# Altium PCB Apollo_Main_Board_1 8.PcbDoc (part 2 of 4)
Units mil, origin at the board's own origin, x right, y up, seen from the top; angles counter-clockwise.
Board outline 984.25 x 629.92 mil, 6 copper layers (Top, Inner Layer 2, Inner Layer 3, Inner Layer 4, Inner Layer 5, Bottom), stack 5.16 mil thick; 125 components, 112 nets, 514 pads, 2007 vias.
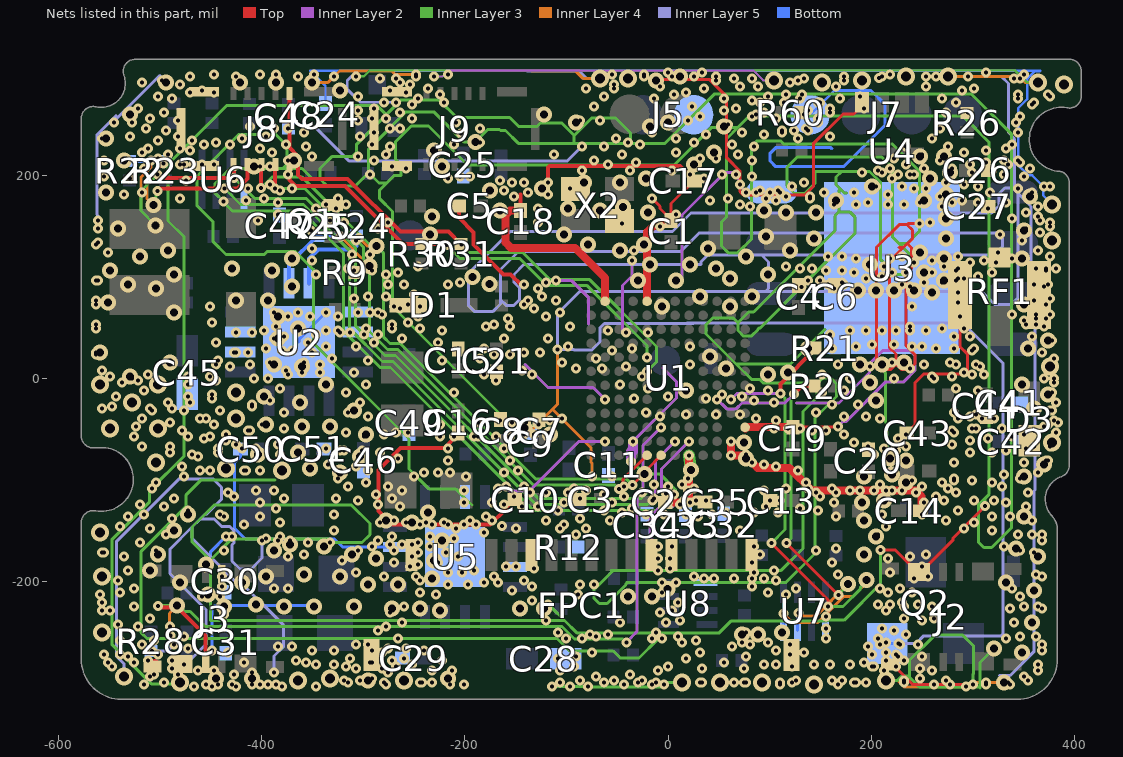
[diagram p6: the nets of this part, all layers, seen from the top]

## Via types
v1: diameter 9.84, hole 3.94, Inner Layer 4 to Bottom, 571 vias
v2: diameter 9.84, hole 3.94, Top to Inner Layer 2, 540 vias
v3: diameter 9.84, hole 3.94, Top to Inner Layer 3, 349 vias
v4: diameter 15.75, hole 7.87, Inner Layer 3 to Inner Layer 4, 268 vias
v5: diameter 9.84, hole 3.94, Inner Layer 5 to Bottom, 178 vias
v6: diameter 17.72, hole 9.84, Top to Bottom, 54 vias
v7: diameter 9.84, hole 3.94, Inner Layer 2 to Inner Layer 3, 25 vias
v8: diameter 9.84, hole 3.94, Inner Layer 4 to Inner Layer 5, 22 vias

## Nets (pads, with @x,y where several pads share a name; then routed paths per layer and width w, separated by ;. In a path a pad name is that pad's centre, name@x,y a point inside that pad or via, vN(x,y) a via of type N, cw(c..) or ccw(c..) an arc to the next point about the centre after c; other vN are vias at no path point) (continued)
GND: C1.1 C2.1 C3.1 C4.1 C5.1 C6.1 C7.1 C8.1 C9.1 C10.1 C11.1 C13.2 C14.2 C15.2 C16.2 C17.1 C18.2 C19.2 C20.2 C21.2 C24.2 C25.2 C26.2 C27.2 C28.2 C29.2 C30.1 C31.1 C32.2 C33.2 C34.2 C35.2 C41.2 C42.2 C43.2 C44.2 C45.2 C46.2 C47.1 C48.1 C49.2 C50.2 C51.2 D1.2 D3.1 FPC1.1 FPC1.5 FPC1.6 FPC1.12 FPC1.18 FPC1.19 FPC1.20 J2.0 J2.5 J3.0 J3.2 J3.7 J5.2 J7.1 J8.11 J8.12 J8.15 J9.11 J9.12 J9.15 Q1.2 Q2.2 R9.2 R12.2 R26.1 R60.2 RF1.2 RF1.3 RF1.4 U1.B2 U1.B5 U1.B12 U1.D2 U1.E12 U1.H1 U1.L1 U1.L2 U1.M1 U1.M3 U2.2 U2.3 U2.9 U2.10 U2.17 U3.4 U3.9 U4.4 U5.3 U5.11 U5.15 U5.17 U6.1 U7.1 U8.1 X2.2 X2.4 | length 22913.4
  Top w2.95: J3.7@-478.89,-281.12 -478.89,-299.9 v3(-478.06,-300.73) ; v2(-169.29,7.87) -169.44,6.41 C21.2@-168.93,6.41 ; v3(-127.57,-45.43) -127.57,-41.5 C7.1@-126.95,-40.88 ; v3(-96.77,186.8) -91.55,186.8 X2.4@-91.02,186.27 ; X2.2@-47.71,154.78 v3(-45.32,152.39) ; v3(-15.75,177.17) -7.89,169.31 -7.89,167.01 2.86,156.26 C1.1@2.86,155.38 2.86,172.02 25.17,194.32 C17.1@26.04,194.32 ; -12.38,294.24 40.57,294.24 57.68,277.13 57.68,217.01 70.83,203.86 70.83,183.73 73.98,180.58 134.86,180.58 142.98,188.7 142.98,230.88 172.33,260.23 182.93,260.23 190.98,268.28 U4.4@190.98,271.63 ; U1.M3@75.79,-48.23 76.26,-48.7 U1.M3@76.26,-49.66 ; C19.2@122.75,-48.1 166.35,-48.1 v3(167.21,-47.24) ; v3(131.18,90) 128.44,90 C4.1@128.44,91.22 ; v3(209.07,-169.13) 223.82,-169.13 245.14,-190.46 J2.5@247.11,-190.46 249.08,-190.46 280.59,-158.95 280.59,-157.25 v3(312.1,-125.74) ; J2.0@218.37,-281.88 221.33,-281.88 241.02,-301.57 v3(300.16,-301.57) ; 227.47,128.68 231.44,128.68 ; C43.2@234.77,-53.87 243.13,-45.51 243.13,-4.03 251.5,4.34 294.82,4.34 294.82,23.55 287.38,30.99 RF1.4@287.38,82.19 ; 235.44,132.68 239.44,128.68 239.44,108.22 234.02,102.8 234.02,32.19 243.03,23.18 243.03,14.09 237.54,8.6 229.52,8.6 224.21,13.91 ; v3(247.63,152.17) 236.21,152.17 235.22,151.18 ; C4.1@128.44,91.22 128.57,91.1 C4.1@128.44,91.22 ; 224.21,13.91 224.21,23.9 218,30.11 218,115.23 231.44,128.68 ; 224.21,13.91 218.72,8.42 206.36,8.42 205.17,9.61 205.17,128.85 227.5,151.18 235.22,151.18 ; 231.44,128.68 240.71,137.95 240.71,145.69 235.22,151.18
  Top w3.94: C16.2@-206.55,-53.87 -206.55,-54.74 -220.27,-68.46 -263.4,-68.46 -285.12,-90.18 -285.12,-130.51 -271.49,-144.14 -175.24,-144.14 -159.54,-128.44 -159.54,-127.21 -151.77,-119.44 C10.1@-150.9,-119.44 ; C5.1@-205.96,169.73 -205.96,158.24 -191.39,143.67 -191.39,131.65 -162.13,102.39 -155.22,102.39 v2@-143.96,91.13 ; C18.2@-145.14,165.17 -145.14,180.67 ; v2(-118.11,192.91) -118.11,207.7 -116.62,209.19 11.57,209.19 25.8,194.96 26.04,194.96 C17.1@26.04,194.32
  Top w7.87: C18.2@-145.14,165.17 -155.46,165.17 -160.16,160.46 -160.16,133.83 -154.63,128.3 -91.4,128.3 -62.01,98.91 U1.B12@-62.01,75.79 ; U1.E12@-20.67,75.79 -20.67,143.75 -12.06,152.36 2.86,152.36 C1.1@2.86,155.38 ; C2.1@-2.84,-122.16 20.67,-122.16 v3(20.67,-75.79) ; v3(62.01,-62.01) v3(62.01,-75.79) U1.M1@75.79,-75.79 88.2,-88.2 119.4,-88.2 141.8,-110.6 243.76,-110.6 249.33,-116.17 249.33,-130.36 C14.2@248.36,-130.36 ; U1.M3@76.26,-49.66 77.82,-48.1 C19.2@122.75,-48.1
  Top w10: J3.0@-507.63,-283.88 J3.0@-504.87,-281.12
  Inner Layer 2 w1.97: v2(-230.32,297.24) -221.82,297.24 -215.94,303.12 83.67,303.12 93.49,293.31 v6(104.33,293.31)
  Inner Layer 2 w2.95: -156.13,-110.91 -136.7,-110.91 -87.8,-62.01 v2(-62.01,-62.01) ; -140.63,13.52 -118.15,-8.97 -73.71,-8.97 v2(-62.01,-20.67) ; v2(-110.24,96.46) -95.4,96.46 -78.11,79.16 -78.11,53.39 ; -40.85,42.66 -44.81,46.63 -44.81,91.22 -35.43,100.6 v2(-35.43,116.14) ; v2(-34.45,-62.01) 8.25,-19.31 8.25,-3.37 -5.35,10.23 ; v2(-9.84,-165.35) -17.87,-157.32 -17.87,-136.46 -7.46,-126.05 4.92,-126.05 8.93,-122.05 v2(21.65,-122.05) ; 13.73,99.67 13.73,160.64 55.72,202.64 63.46,202.64 70.59,195.5 70.59,189.25 v2(76.77,183.07) ; 126.49,-24.34 168.2,-24.34 198.27,5.73 198.27,14.42 211.18,27.32 237.54,27.32 243.03,21.83 243.03,7.66 231.94,-3.43 214.2,-3.43 175.21,-42.42 172.03,-42.42 v3(167.21,-47.24)
  Inner Layer 2 w9.84: v7(-36.34,-81.8) -36.34,-71.95 -36.29,-71.9 -34.49,-71.9 -34.45,-71.86 v2(-34.45,-62.01)
  Inner Layer 3 w2.36: v3(-307.09,297.24) -299.37,297.24 -293.69,302.93 341.55,302.93 353.13,291.34 v6(364.17,291.34)
  Inner Layer 3 w2.95: v3(-478.06,-300.73) -508.63,-300.73 -547.54,-261.82 -547.54,-158.81 -510.64,-121.91 -510.64,-110.77 -476.26,-76.4 -476.26,138.98 -492.12,154.84 -492.12,210.78 -434.16,268.74 -286.73,268.74 -277.49,259.5 ; v4(-454.72,-183.07) v4@-450.35,-179.1 ; -386.71,-99.96 -459.46,-99.96 -474.67,-115.17 -474.67,-126.3 -518.65,-170.28 -518.65,-250.35 -512.82,-256.18 -109.27,-256.18 -97.01,-268.43 -54.01,-268.43 ; -193.1,-124.79 -209.12,-108.77 -235.58,-108.77 -254.98,-89.36 -254.98,-59.64 -348.8,34.17 -348.8,106.68 -366.86,124.74 -394.58,124.74 -397.45,121.87 -435.13,121.87 -447.72,134.46 -447.72,153.74 -463.49,169.51 -463.49,199.05 -422.36,240.18 -386.48,240.18 -375.18,228.88 -375.18,210.84 -379.44,206.58 ; v3(-127.57,-45.43) v4(-141.59,-49.13) -150.1,-40.62 -160.15,-40.62 -271.34,70.58 -271.34,164.22 -283.93,176.81 -283.93,185.41 -277.05,192.29 ; v4@-115.1,-223 -115.1,-225.28 -101.93,-238.45 ; v3(-114.17,-303.15) -83.71,-303.15 -83.07,-303.79 -7.1,-303.79 -2.52,-299.21 v6(13.78,-299.21) ; -56.11,-189.05 -53.75,-189.05 ; -54,-268.42 -47.19,-275.24 -28.57,-275.24 -10.14,-256.81 -10.14,-250.55 ; v7(-36.34,-81.8) v4(-23.25,-94.05) -8.29,-94.05 7.28,-109.62 7.28,-117.36 -5.31,-129.95 -132.77,-129.95 -273.3,10.58 -278.38,10.58 -283.45,10.58 -319.27,46.4 -319.27,122.92 -361.05,164.7 -429.06,164.7 -437.64,173.28 v7(-437.64,173.92) -445.77,182.05 -445.77,191.71 -430.9,206.58 -379.44,206.58 ; 82.76,141.83 82.21,142.38 ; 154.52,48.18 120.47,14.13 66.88,14.13 ; 168.03,185.28 168.03,163.75 ; 175.81,182.17 173.56,182.17 165.31,190.42 165.31,198.16 170.8,203.65 ; v3(209.07,-169.13) 209.07,-202.26 173.26,-238.07 157.25,-238.07 156.62,-238.7 62.25,-238.7 50.4,-250.55 -10.14,-250.55 ; v4(210.63,13.78) 214.08,4.42 214.08,-43.24 215.81,-44.97 215.81,-69.38 v4(218.5,-78.74) ; v6(214.57,-297.24) 225.9,-297.24 230.34,-292.81 236.17,-292.81 247.22,-303.86 306.15,-303.86 306.94,-304.65 306.94,-279.67 v4(320.87,-265.75) ; 237.65,-297.25 237.65,-277.61 262.39,-252.87 290.08,-252.87 300.74,-263.54 300.74,-290.57 300.16,-291.15 v3(300.16,-301.57) ; v3(312.1,-125.74) 312.1,-118.01 ; v4@-450.35,-179.1 -468.55,-160.91 -468.55,-146.42 -446.77,-124.64 -311.74,-124.64 -293.46,-142.92 -293.46,-146.61 -293.46,-153.92 -301.25,-161.71 -329.41,-161.71 -333.19,-157.93 -429.44,-157.93 -450.35,-178.84 v4@-450.35,-179.1 ; v4@-450.35,-179.1 -450.35,-238.45 -101.93,-238.45 ; -379.44,206.58 -360.14,206.58 -349.79,196.23 -342.61,196.23 ; -342.61,196.23 -335.4,189.02 -308.28,189.02 -294.76,202.53 ; -342.61,196.23 -342.61,206.43 -330.95,218.09 -311.03,218.09 -306.57,222.55 -306.57,230.41 -277.49,259.5 ; -294.76,202.53 -294.76,225.52 -258.39,261.89 -230.13,261.89 -201.04,232.8 v4(-189.74,232.8) -177.8,244.74 -165.84,244.74 -164.93,243.83 -159.96,243.83 -147.46,231.33 -92.41,231.33 ; -294.76,202.53 -284.52,192.29 -277.05,192.29 ; -277.49,259.5 -263.28,273.71 -225.24,273.71 -208.12,256.59 -155.87,256.59 -147.34,248.06 -129.03,248.06 -125.58,251.51 -104.91,251.51 -92.41,239.01 ; -277.05,192.29 -269.65,199.69 -263,199.69 -263,210.41 -268.5,215.91 -268.5,232.57 -252.78,248.29 -235.73,248.29 -197.48,210.04 5.96,210.04 42.89,246.97 68.85,246.97 ; -101.93,-238.45 -89.83,-250.55 -10.14,-250.55 ; -92.41,231.33 -36.97,231.33 ; -92.41,231.33 -92.41,239.01 ; -92.41,239.01 -75.23,256.19 -51.59,256.19 -36.97,241.57 -36.97,231.33 ; -53.75,-189.05 -73.16,-208.46 -73.16,-216.2 -67.67,-221.69 -59.95,-221.69 -41.42,-203.16 -41.42,-202.06 -40.23,-200.87 116.12,-200.87 144.56,-172.43 144.56,-39.12 165.7,-17.97 165.7,-5.25 160.21,0.24 152.49,0.24 146.56,-5.69 146.56,-9.95 ; -53.75,-189.05 111.24,-189.05 132.75,-167.54 132.75,-32.74 146.56,-18.93 146.56,-9.95 ; -36.97,231.33 -2.99,231.33 45.3,279.6 298.7,279.6 338.2,240.1 338.2,-146.89 318.49,-166.6 310.77,-166.6 305.28,-161.11 305.28,-124.83 312.1,-118.01 ; 66.88,14.13 81.99,-0.98 89.87,-0.98 93.35,-4.46 141.07,-4.46 146.56,-9.95 ; 66.88,14.13 37.3,43.7 37.3,52.75 43.71,59.16 64.25,59.16 68.74,54.67 ; 68.74,54.67 79.3,65.23 84.17,65.23 164.19,145.25 164.19,159.91 168.03,163.75 ; 68.74,54.67 68.74,46.93 74.23,41.44 81.95,41.44 88.37,47.86 88.37,48.43 89.3,49.36 90.54,49.36 v3(131.18,90) 184.17,142.99 184.17,158.41 178.68,163.9 168.18,163.9 168.03,163.75 ; 68.85,246.97 57.44,235.56 57.44,158.64 52.65,153.85 52.65,130.17 59.28,123.54 68.66,123.54 82.21,137.09 82.21,142.38 ; 68.85,246.97 80.2,258.32 289.92,258.32 316.07,232.17 316.07,-114.04 312.1,-118.01 ; 82.21,142.38 82.21,228.31 87.7,233.8 110.7,233.8 113.66,230.84 220.36,230.84 247.63,203.57 v3(247.63,152.17) 247.63,144.87 235.22,132.46 227.5,132.46 ; 170.8,203.65 145.25,203.65 144.81,203.21 144.81,192.15 134.53,181.87 124.35,181.87 117.14,189.08 117.14,207.91 127.07,217.84 210.15,217.84 221.04,206.95 221.04,138.92 227.5,132.46 ; 170.8,203.65 198.27,203.65 209.23,192.69 209.23,116.77 223.76,102.24 231.48,102.24 236.97,107.73 236.97,122.99 227.5,132.46
  Inner Layer 3 w11.81: v3(-96.77,186.8) v4(-82.68,192.91) ; v3(-45.32,152.39) v4(-44.59,168.62) ; v3(20.67,-75.79) v4(22.59,-90.02)
  Inner Layer 4 w2.95: v4(-350.39,291.34) -334.61,291.34 -323.49,302.47 -272.13,302.47 -268.88,299.21 v1(-248.03,299.21) ; v4(-141.59,-49.13) -132.51,-49.13 -113.85,-30.47 ; -134.34,302.63 -91.29,302.63 -83.94,295.28 v6(-66.93,295.28) ; v8(-109.09,28.49) -109.09,-25.71 -113.85,-30.47 ; v1(-74.8,-96.46) -74.8,-83.59 -75.66,-82.74 -75.66,-68.65 -113.85,-30.47 ; v6(214.57,-297.24) 225.9,-297.24 232.31,-303.65 295.77,-303.65 300.21,-299.21 v4(330.71,-299.21) ; v6(275.59,297.24) 345.42,297.24 351.32,291.34 v6(364.17,291.34)
  Inner Layer 5 w2.76: v1(-267.72,271.65) -302.91,271.65 -315.8,284.54 -315.8,292.95 -306.12,302.63 -139.07,302.63
  Inner Layer 5 w2.95: v1(-561.02,147.64) -561.02,160.11 -561.94,161.03 -561.94,239.94 -549.38,252.51 ; -543.33,258.55 -549.38,252.51 ; v6(-535.43,-293.31) -535.43,-280.85 -543.09,-273.19 -543.09,-160.86 -481.21,-98.98 -448.05,-98.98 -439.69,-107.34 -439.69,-119.16 -454.65,-134.12 -456.25,-134.12 -460.75,-138.62 ; -500.26,298.06 -545.82,252.51 -549.38,252.51 ; v1(-488.19,-285.43) -478.35,-285.43 -454.81,-261.89 -454.81,-227.79 -490.35,-192.25 -490.35,-168.22 -468.55,-146.42 ; v1(-399.61,-159.45) -399.61,-176.99 -410.4,-187.78 -421.4,-187.78 -429.19,-179.99 -429.19,-163.85 -427.48,-162.14 -427.48,-149.9 -431.71,-145.67 -439.47,-145.67 -446.51,-138.62 -460.75,-138.62 ; v1(-387.8,-289.37) -387.8,-273.26 -378.4,-263.87 -378.4,-243.16 -421.27,-200.29 -425.68,-200.29 -468.55,-157.42 -468.55,-146.42 ; -347.84,247.68 -314.23,214.07 -98.92,214.07 v1(-84.65,228.35) ; -139.07,302.63 -87.72,302.63 -80.37,295.28 v6(-66.93,295.28) ; 18.63,54.47 25.46,54.47 ; v5(226.85,-261.08) 243.9,-261.08 251.49,-253.49 327.97,-253.49 329.45,-252.01 329.45,15.03 290,54.48 ; v6(275.59,297.24) 327.95,297.24 334.95,290.25 334.95,241.82 341.05,235.72 341.05,185.36 ; 289.99,54.47 25.46,54.47 ; 325.97,-292.53 327.97,-292.53 ; v5(334.65,-299.21) 327.97,-292.53 ; -468.55,-146.42 -460.75,-138.62 ; -164.88,77.3 -164.88,73.16 -172.17,65.87 -190.86,65.87 -196.35,71.36 -196.35,103.53 -155.43,144.45 4.22,144.45 22.42,162.65 318.44,162.65 325.82,170.03 325.82,181.79 331.36,187.33 339.08,187.33 341.05,185.36 ; -164.88,77.3 -159.39,71.81 -151.67,71.81 -146.18,77.3 -146.18,88.9 -151.74,94.46 -151.74,102.2 -141.98,111.96 32.45,111.96 32.45,114.75 39.15,121.45 91.94,121.45 ; -164.88,77.3 -164.88,107.16 -147.28,124.76 12.38,124.76 30.58,142.96 323.67,142.96 329.16,137.47 329.16,129.73 320.88,121.45 91.94,121.45 ; 25.46,54.47 24.85,53.86 -62.77,53.86 -67.22,49.41 -67.22,35.69 -75.08,27.83 -92.42,27.83 -93.08,28.49 v8(-109.09,28.49) -109.09,63.23 -86.94,85.38 95.85,85.38 ; 91.94,121.45 98.91,114.48 98.91,88.44 95.85,85.38 ; 95.85,85.38 308.69,85.38 321.67,72.4 337.67,72.4 344.57,79.3 344.57,181.84 ; 327.97,-292.53 336.64,-292.53 359.95,-269.23 359.95,-111.22 361.16,-110.01 361.16,89.02 357.28,92.9 357.28,169.13 344.57,181.84 ; 341.05,185.36 344.57,181.84
  Bottom w2.36: C24.2@-337.17,270.52 -337.17,287.83 -352.2,302.86 -91.59,302.86 ; v6(-66.93,295.28) -84,295.28 -91.59,302.86 ; v6(377.95,171.26) 369.07,180.14 369.07,189.02 358.28,199.8 354.56,199.8 344.5,209.86 344.5,265.76 353.35,274.61 353.35,294.71 360.75,302.11 365.64,302.11 366.39,302.86 -91.59,302.86
  Bottom w2.95: v1(-448.82,-267.72) -448.82,-228.79 -450.19,-227.42 ; v1(-435.04,-155.51) -450.19,-170.66 -450.19,-227.42 ; C50.2@-420.85,-69.61 -420.85,-77.46 -426.69,-83.3 -426.69,-147.55 -416.17,-158.07 -328.34,-158.07 -320.31,-166.1 U5.11@-268.68,-166.1 ; U2.17@-363.17,35.65 -363.17,38.41 v1(-336.61,64.96) ; -350.54,-223.65 -446.42,-223.65 -450.19,-227.42 ; U2.9@-305.29,65.18 v5(-305.12,64.96) ; J7.1@139.75,259.26 163.69,283.19 199.66,283.19 213.68,269.17 213.68,249.35 172.66,208.32 105.9,208.32 100.41,213.81 100.41,221.55 105.9,227.04 160.14,227.04 161.13,226.05 ; Q2.2@215.73,-261.08 v5(226.85,-261.08) Q2.2@215.73,-261.08
  other v1: 293.31,-303.15 -277.56,-301.18 167.32,-301.18 312.99,-301.18 -244.09,-299.21 -106.3,-299.21 74.8,-299.21 122.05,-299.21 183.07,-299.21 194.88,-299.21 -318.9,-297.24 -86.61,-297.24 -53.15,-297.24 -25.59,-297.24 232.28,-297.24 -509.84,-293.31 -70.87,-293.31 350.39,-293.31 -427.17,-291.34 -275.59,-289.37 -462.6,-287.4 -106.3,-287.4 -9.84,-287.4 33.46,-285.43 -316.93,-283.46 -92.52,-283.46 0,-283.46 200.79,-283.46 364.17,-281.5 -551.18,-279.53 -417.32,-279.53 -356.3,-279.53 -293.31,-279.53 -271.65,-277.56 232.28,-277.56 -259.84,-275.59 -108.27,-275.59 17.72,-275.59 -531.5,-273.62 -90.55,-273.62 200.79,-271.65 -433.07,-269.69 -281.5,-269.69 -74.8,-269.69 214.57,-269.69 246.06,-261.81 368.11,-261.81 13.78,-259.84 27.56,-257.87 -265.75,-255.91 -15.75,-255.91 155.51,-255.91 206.69,-255.91 -76.77,-251.97 -285.43,-248.03 155.51,-246.06 210.63,-246.06 -261.81,-240.16 232.28,-236.22 214.57,-228.35 368.11,-226.38 -557.09,-220.47 230.31,-220.47 -228.35,-212.6 -244.09,-210.63 216.54,-210.63 -216.54,-202.76 -86.61,-202.76 -72.83,-202.76 -244.09,-198.82 35.43,-196.85 45.28,-196.85 64.96,-196.85 82.68,-196.85 94.49,-196.85 25.59,-194.88 368.11,-194.88 -216.54,-190.94 -202.76,-190.94 218.5,-190.94 -190.94,-188.98 -159.45,-185.04 -149.61,-185.04 -246.06,-183.07 216.54,-177.17 -358.27,-173.23 -555.12,-171.26 -246.06,-171.26 -234.25,-165.35 -273.62,-163.39 -261.81,-163.39 -354.33,-161.42 -246.06,-161.42 -234.25,-155.51 -90.55,-153.54 368.11,-153.54 -181.1,-151.57 318.9,-149.61 -106.3,-147.64 291.34,-147.64 214.57,-145.67 301.18,-141.73 -57.09,-139.76 -531.5,-135.83 -437.01,-135.83 29.53,-135.83 165.35,-135.83 318.9,-135.83 -21.65,-133.86 -3.94,-133.86 17.72,-133.86 210.63,-133.86 -45.28,-131.89 84.65,-131.89 108.27,-131.89 -62.99,-129.92 147.64,-129.92 285.43,-129.92 -35.43,-127.95 129.92,-127.95 -143.7,-125.98 -127.95,-125.98 -519.69,-124.02 -285.43,-124.02 -161.42,-124.02 -200.79,-122.05 -55.12,-122.05 0,-122.05 163.39,-122.05 15.75,-120.08 27.56,-120.08 110.24,-120.08 301.18,-120.08 320.87,-120.08 -13.78,-118.11 -43.31,-116.14 -287.4,-114.17 -62.99,-114.17 5.91,-114.17 -433.07,-112.2 -135.83,-112.2 -120.08,-112.2 -98.43,-112.2 -25.59,-112.2 283.46,-112.2 -200.79,-110.24 -80.71,-110.24 94.49,-110.24 220.47,-110.24 -507.87,-108.27 25.59,-108.27 116.14,-108.27 137.8,-108.27 161.42,-108.27 -159.45,-106.3 -141.73,-106.3 -43.31,-106.3 0,-106.3 13.78,-104.33 208.66,-104.33 318.9,-102.36 299.21,-100.39 -198.82,-96.46 -55.12,-96.46 -240.16,-92.52 -226.38,-92.52 -214.57,-92.52 -161.42,-92.52 -460.63,-90.55 -417.32,-90.55 -147.64,-90.55 -478.35,-86.61 -334.65,-84.65 -155.51,-80.71 -468.5,-74.8 -381.89,-74.8 -490.16,-72.83 -442.91,-72.83 -322.83,-70.87 -419.29,-68.9 -336.61,-68.9 -517.72,-66.93 -435.04,-61.02 -456.69,-59.06 -190.94,-57.09 -169.29,-57.09 -155.51,-57.09 -279.53,-55.12 -267.72,-53.15 -255.91,-53.15 281.5,-53.15 -478.35,-51.18 299.21,-49.21 -523.62,-47.24 370.08,-47.24 -446.85,-45.28 383.86,-43.31 106.3,-41.34 86.61,-39.37 208.66,-39.37 -7.87,-37.4 173.23,-37.4 194.88,-37.4 17.72,-35.43 47.24,-35.43 70.87,-35.43 303.15,-35.43 -21.65,-33.46 145.67,-33.46 281.5,-33.46 377.95,-31.5 -509.84,-29.53 -488.19,-29.53 -547.24,-27.56 161.42,-25.59 187.01,-25.59 -470.47,-23.62 104.33,-23.62 84.65,-21.65 -448.82,-19.69 -33.46,-19.69 37.4,-19.69 0,-17.72 72.83,-17.72 53.15,-15.75 151.57,-13.78 98.43,-11.81 173.23,-11.81 305.12,-11.81 -19.69,-9.84 80.71,-9.84 283.46,-9.84 -472.44,-5.91 -47.24,-5.91 379.92,-3.94 -444.88,-1.97 179.13,0 222.44,0 261.81,0 370.08,0 -25.59,1.97 151.57,3.94 291.34,5.91 -557.09,7.87 -375.98,7.87 -90.55,9.84 -64.96,9.84 -41.34,11.81 307.09,11.81 -444.88,13.78 -342.52,13.78 21.65,13.78 167.32,13.78 251.97,13.78 -104.33,15.75 277.56,15.75 -70.87,19.69 -171.26,23.62 -155.51,23.62 -425.2,25.59 -413.39,25.59 -350.39,25.59 -125.98,25.59 -379.92,27.56 -370.08,27.56 -55.12,27.56 -395.67,29.53 -181.1,29.53 -35.43,29.53 161.42,29.53 263.78,29.53 281.5,29.53 301.18,29.53 -336.61,31.5 21.65,31.5 185.04,31.5 240.16,31.5 250,31.5 200.79,33.46 222.44,33.46 -444.88,35.43 -354.33,35.43 -118.11,39.37 281.5,41.34 -346.46,43.31 -299.21,43.31 159.45,43.31 -425.2,45.28 -409.45,45.28 -312.99,45.28 -41.34,45.28 -19.69,45.28 -397.64,47.24 -336.61,47.24 -324.8,47.24 -59.06,47.24 179.13,47.24 194.88,47.24 210.63,47.24 224.41,47.24 238.19,47.24 253.94,47.24 -562.99,49.21 269.68,49.21 370.08,51.18 -448.82,55.12 350.39,57.09 362.2,59.06 -352.36,61.02 -324.8,61.02 -246.06,61.02 338.58,62.99 375.98,62.99 -364.17,64.96 -263.78,68.9 -450.79,70.87 -309.06,78.74 375.98,78.74 -295.28,80.71 -277.56,80.71 -250,82.68 -127.95,88.58 -275.59,92.52 -259.84,92.52 157.48,92.52 173.23,92.52 374.02,92.52 -120.08,94.49 -561.02,96.46 137.8,96.46 149.61,96.46 194.88,98.43 291.34,98.43 210.63,100.39 305.12,100.39 -265.75,104.33 183.07,104.33 220.47,104.33 234.25,104.33 318.9,104.33 155.51,106.3 171.26,106.3 283.46,106.3 -314.96,108.27 129.92,108.27 141.73,108.27 372.05,108.27 381.89,108.27 -246.06,110.24 116.14,110.24 212.6,110.24 242.13,114.17 297.24,114.17 259.84,116.14 311.02,116.14 185.04,118.11 218.5,118.11 157.48,120.08 171.26,120.08 230.31,120.08 285.43,120.08 375.98,120.08 -551.18,124.02 -562.99,131.89 -285.43,147.64 -7.87,149.61 375.98,149.61 -275.59,153.54 -403.54,155.51 364.17,159.45 -383.86,161.42 7.87,161.42 70.87,171.26 185.04,171.26 216.54,171.26 232.28,171.26 -383.86,173.23 196.85,173.23 305.12,173.23 -415.35,175.2 289.37,175.2 -480.32,177.17 -397.64,177.17 59.06,177.17 139.76,177.17 216.54,181.1 86.61,183.07 100.39,183.07 110.24,183.07 153.54,183.07 183.07,183.07 -381.89,185.04 -413.39,187.01 -370.08,187.01 242.13,187.01 230.31,188.98 305.12,188.98 375.98,188.98 -391.73,190.94 70.87,190.94 291.34,190.94 -474.41,194.88 -216.54,196.85 35.43,196.85 220.47,196.85 -204.72,198.82 -194.88,198.82 82.68,198.82 -374.02,200.79 53.15,200.79 66.93,200.79 238.19,200.79 299.21,202.76 3.94,204.72 206.69,204.72 218.5,206.69 251.97,206.69 356.3,206.69 -391.73,208.66 -476.38,210.63 -59.06,210.63 234.25,210.63 297.24,210.63 334.65,210.63 -31.5,212.6 312.99,212.6 346.46,212.6 82.68,214.57 222.44,216.54 -350.39,218.5 -45.28,220.47 68.9,220.47 -389.76,222.44 7.87,222.44 291.34,222.44 312.99,224.41 332.68,226.38 -356.3,228.35 84.65,228.35 234.25,228.35 275.59,228.35 -375.98,230.31 -27.56,230.31 62.99,230.31 -39.37,232.28 25.59,232.28 7.87,236.22 127.95,236.22 259.84,236.22 -395.67,238.19 159.45,238.19 37.4,240.16 94.49,240.16 -358.27,242.13 72.83,242.13 112.2,244.09 -387.8,246.06 -374.02,246.06 135.83,246.06 342.52,251.97 19.68,253.94 106.3,255.91 147.64,255.91 31.5,257.87 82.68,257.87 94.49,261.81 55.12,263.78 137.8,263.78 66.93,265.75 159.45,265.75 23.62,267.72 358.27,269.69 -220.47,271.65 114.17,271.65 147.64,271.65 82.68,273.62 -246.06,275.59 55.12,275.59 129.92,275.59 98.43,277.56 375.98,277.56 -224.41,279.53 5.91,279.53 17.72,281.5 -236.22,285.43 -53.15,285.43 35.43,285.43 70.87,287.4 253.94,287.4 -253.94,289.37 -263.78,291.34 47.24,293.31 127.95,293.31 173.23,293.31 82.68,295.28 -230.32,297.24 -23.62,297.24 25.59,297.24 210.63,297.24 263.78,297.24 -216.54,299.21 -55.12,299.21
  other v2: -515.75,-301.18 -454.72,-301.18 -442.91,-301.18 -409.45,-301.18 -393.7,-301.18 -214.57,-301.18 -43.31,-301.18 -15.75,-301.18 -3.94,-301.18 261.81,-301.18 277.56,-301.18 336.61,-301.18 -496.06,-299.21 -62.99,-299.21 -29.53,-299.21 -291.34,-295.28 -232.28,-287.4 -212.6,-287.4 -307.09,-285.43 -281.5,-285.43 74.8,-285.43 -267.72,-283.46 122.05,-283.46 202.76,-283.46 -476.38,-281.5 -346.46,-281.5 -328.74,-281.5 -251.97,-281.5 94.49,-281.5 106.3,-281.5 143.7,-281.5 159.45,-281.5 179.13,-281.5 -525.59,-279.53 -291.34,-279.53 55.12,-279.53 192.91,-279.53 -511.81,-277.56 -488.19,-277.56 -366.14,-277.56 -222.44,-277.56 214.57,-277.56 -312.99,-275.59 76.77,-273.62 -539.37,-271.65 -501.97,-271.65 120.08,-271.65 133.86,-269.69 -350.39,-267.72 -328.74,-267.72 -291.34,-267.72 -240.16,-267.72 106.3,-267.72 -472.44,-265.75 -275.59,-265.75 -257.87,-265.75 -383.86,-263.78 -370.08,-263.78 62.99,-263.78 196.85,-263.78 -517.72,-261.81 -486.22,-261.81 -307.09,-261.81 80.71,-261.81 120.08,-261.81 208.66,-261.81 228.35,-261.81 98.43,-259.84 -539.37,-257.87 -505.91,-257.87 -100.39,-255.91 -84.65,-255.91 -5.91,-255.91 -476.38,-253.94 -70.87,-253.94 9.84,-253.94 -59.06,-251.97 -108.27,-250 -11.81,-250 -521.65,-244.09 -490.16,-244.09 -541.34,-242.13 -47.24,-240.16 -1.97,-240.16 360.24,-240.16 -120.08,-238.19 11.81,-238.19 -509.84,-236.22 -437.01,-232.28 -7.87,-230.31 -549.21,-228.35 3.94,-228.35 -525.59,-224.41 232.28,-224.41 -118.11,-222.44 206.69,-222.44 218.5,-222.44 9.84,-220.47 -458.66,-214.57 -440.94,-214.57 -88.58,-212.6 116.14,-212.6 -539.37,-210.63 -5.91,-210.63 98.43,-210.63 240.16,-210.63 -525.59,-206.69 125.98,-206.69 208.66,-206.69 228.35,-206.69 338.58,-206.69 360.24,-206.69 -133.86,-204.72 82.68,-204.72 -5.91,-200.79 7.87,-200.79 -541.34,-198.82 -141.73,-198.82 106.3,-198.82 242.13,-196.85 255.91,-194.88 167.32,-192.91 84.65,-190.94 -531.5,-188.98 -9.84,-188.98 104.33,-188.98 1.97,-187.01 250,-185.04 82.68,-181.1 161.42,-181.1 -285.43,-177.17 -9.84,-177.17 1.97,-177.17 -535.43,-175.2 238.19,-175.2 253.94,-173.23 360.24,-171.26 -503.94,-169.29 -387.8,-169.29 -305.12,-169.29 145.67,-169.29 346.46,-169.29 165.35,-167.32 3.94,-165.35 330.71,-165.35 -519.69,-161.42 -381.89,-155.51 -494.09,-153.54 206.69,-153.54 70.87,-149.61 -509.84,-147.64 -149.61,-147.64 -80.71,-147.64 -539.37,-145.67 -163.69,-145.42 -417.32,-143.7 -244.09,-143.7 -232.28,-143.7 -216.54,-143.7 -200.79,-143.7 -188.98,-143.7 -102.36,-143.7 -381.89,-141.73 -283.46,-141.73 -257.87,-141.73 -269.69,-139.76 -120.08,-139.76 358.27,-139.76 -488.19,-137.8 -86.61,-137.8 -401.57,-135.83 -179.13,-135.83 336.61,-135.83 -515.75,-133.86 -440.94,-133.86 250,-133.86 -472.44,-129.92 -108.27,-129.92 -385.83,-127.95 -496.06,-125.98 352.36,-125.98 11.81,-124.02 -401.57,-122.05 -173.23,-122.05 -102.36,-122.05 251.97,-122.05 332.68,-122.05 -305.12,-120.08 37.4,-120.08 100.39,-120.08 -486.22,-118.11 -377.95,-118.11 -86.61,-118.11 -427.17,-116.14 -151.57,-116.14 263.78,-116.14 145.67,-112.2 165.35,-112.2 244.09,-112.2 -405.51,-110.24 -387.8,-110.24 19.68,-110.24 179.13,-110.24 188.98,-110.24 202.76,-110.24 214.57,-110.24 230.31,-110.24 -167.32,-108.27 -92.52,-108.27 275.59,-108.27 -314.96,-106.3 328.74,-106.3 -503.94,-102.36 -297.24,-102.36 135.83,-102.36 19.68,-98.43 281.5,-98.43 346.46,-98.43 -476.38,-96.46 330.71,-94.49 364.17,-92.52 -450.79,-90.55 127.95,-90.55 -307.09,-86.61 106.3,-86.61 94.49,-84.65 82.68,-82.68 281.5,-82.68 350.39,-82.68 374.02,-80.71 -462.6,-76.77 76.77,-74.8 297.24,-72.83 318.9,-72.83 -301.18,-70.87 224.41,-70.87 332.68,-70.87 -442.91,-68.9 -405.51,-68.9 196.85,-66.93 375.98,-66.93 279.53,-64.96 183.07,-62.99 297.24,-61.02 314.96,-59.06 -472.44,-57.09 -450.79,-57.09 -299.21,-57.09 -224.41,-57.09 -187.01,-57.09 338.58,-57.09 173.23,-55.12 -204.72,-53.15 381.89,-53.15 141.73,-51.18 155.51,-51.18 279.53,-51.18 104.33,-49.21 118.11,-49.21 129.92,-49.21 303.15,-49.21 328.74,-49.21 -399.61,-45.28 -224.41,-45.28 -187.01,-43.31 -139.76,-43.31 -165.35,-41.34 -116.14,-41.34 379.92,-41.34 -460.63,-39.37 -104.33,-39.37 285.43,-39.37 309.06,-39.37 320.87,-39.37 297.24,-37.4 -314.96,-33.46 -476.38,-31.5 -303.15,-23.62 381.89,-23.62 -391.73,-21.65 -472.44,-17.72 -448.82,-15.75 -210.63,-13.78 377.95,-13.78 -297.24,-5.91 -169.29,-1.97 -527.56,0 -393.7,0 379.92,0 -472.44,1.97 -450.79,1.97 259.84,1.97 279.53,1.97 -374.02,3.94 -181.1,3.94 -133.86,3.94 299.21,3.94 311.02,3.94 -309.06,5.91 -143.7,7.87 283.46,13.78 303.15,13.78 -391.73,15.75 -442.91,17.72 -295.28,17.72 -222.44,17.72 -185.04,19.69 379.92,19.69 -562.99,23.62 -427.17,25.59 299.21,27.56 -206.69,29.53 281.5,29.53 -307.09,31.5 -289.37,35.43 -226.38,35.43 377.95,37.4 -261.81,39.37 297.24,41.34 -322.83,45.28 -222.44,47.24 -297.24,49.21 -271.65,49.21 -244.09,49.21 291.34,49.21 -155.51,51.18 238.19,51.18 -171.26,53.15 -255.91,55.12 -120.08,61.02 287.4,61.02 -285.43,64.96 -106.3,64.96 -131.89,68.9 -269.69,70.87 -244.09,70.87 240.16,70.87 -562.99,72.83 -255.91,72.83 -141.73,72.83 285.43,74.8 -110.24,76.77 -124.02,80.71 238.19,90.55 -216.54,92.52 -141.73,92.52 -204.72,94.49 -120.08,94.49 -346.46,102.36 -277.56,102.36 -309.06,106.3 -291.34,106.3 322.83,114.17 -350.39,116.14 338.58,118.11 -311.02,122.05 -293.31,122.05 324.8,124.02 -45.28,125.98 -33.46,125.98 -350.39,127.95 -307.09,135.83 348.43,135.83 326.77,141.73 -351.51,145.53 352.36,147.64 -318.9,153.54 -332.68,155.51 338.58,157.48 -346.46,167.32 -326.77,167.32 314.96,167.32 80.71,169.29 364.17,169.29 -336.61,171.26 332.68,173.23 -118.11,181.1 -553.15,183.07 -517.72,183.07 316.93,183.07 358.27,183.07 122.05,188.98 133.86,192.91 -293.31,200.79 226.38,200.79 242.13,200.79 330.71,200.79 190.94,202.76 210.63,202.76 318.9,204.72 -515.75,206.69 -257.87,206.69 -271.65,208.66 -480.32,210.63 -458.66,210.63 -446.85,210.63 -289.37,214.57 330.71,214.57 -533.46,216.54 -501.97,216.54 -305.12,218.5 -492.13,220.47 -277.56,220.47 -112.2,220.47 -470.47,224.41 -511.81,226.38 -480.32,226.38 -273.62,228.35 -456.69,230.31 -431.1,230.31 -291.34,230.31 -210.63,230.31 338.58,230.31 -444.88,232.28 -185.04,232.28 -501.97,234.25 -468.5,234.25 -557.09,236.22 -419.29,236.22 -482.28,238.19 -303.15,238.19 -289.37,242.13 -15.75,242.13 112.2,242.13 -494.09,244.09 124.02,244.09 137.8,244.09 -513.78,246.06 -273.62,246.06 -263.78,246.06 -185.04,246.06 267.72,246.06 -411.42,248.03 -527.56,251.97 -208.66,251.97 147.64,251.97 -482.28,253.94 -86.61,253.94 -66.93,253.94 -509.84,255.91 -277.56,255.91 -251.97,255.91 86.61,259.84 133.86,259.84 -496.06,261.81 -263.78,261.81 159.45,261.81 273.62,261.81 295.28,261.81 -521.65,265.75 192.91,265.75 -72.83,267.72 -251.97,269.69 90.55,271.65 149.61,271.65 283.46,271.65 -488.19,275.59 -13.78,275.59 169.29,275.59 269.68,275.59 -62.99,277.56 188.98,277.56 116.14,279.53 131.89,279.53 344.49,279.53 374.02,279.53 -257.87,281.5 -273.62,283.46 289.37,283.46 -498.03,293.31 -283.46,295.28 -267.72,295.28 340.55,295.28 -425.2,297.24 -248.03,297.24 47.24,297.24 -385.83,299.21 -348.43,299.21 33.46,301.18
  other v3: -466.54,-303.15 -379.92,-303.15 -346.46,-303.15 -96.46,-303.15 -78.74,-303.15 -429.13,-301.18 -200.79,-301.18 -314.96,-299.21 -279.53,-299.21 -242.13,-299.21 -232.28,-299.21 33.46,-299.21 64.96,-299.21 76.77,-299.21 110.24,-299.21 185.04,-299.21 194.88,-299.21 232.28,-299.21 312.99,-299.21 125.98,-297.24 161.42,-297.24 171.26,-297.24 354.33,-297.24 -505.91,-291.34 -482.28,-291.34 212.6,-287.4 364.17,-287.4 -547.24,-283.46 224.41,-283.46 226.38,-273.62 -555.12,-271.65 368.11,-267.72 332.68,-255.91 346.46,-253.94 362.2,-253.94 340.55,-240.16 -557.09,-228.35 336.61,-226.38 350.39,-224.41 364.17,-224.41 -133.86,-218.5 346.46,-214.57 -559.06,-212.6 -153.54,-208.66 -387.8,-206.69 -374.02,-206.69 -438.98,-204.72 -167.32,-200.79 -438.98,-194.88 -279.53,-194.88 -248.03,-194.88 362.2,-192.91 -307.09,-190.94 -253.94,-185.04 -269.69,-181.1 -320.87,-179.13 -374.02,-175.2 -251.97,-175.2 90.55,-173.23 -557.09,-171.26 -437.01,-169.29 -269.69,-169.29 84.65,-165.35 -251.97,-163.39 -285.43,-159.45 368.11,-159.45 -395.67,-157.48 -429.13,-155.51 -271.65,-155.51 344.49,-153.54 358.27,-153.54 354.33,-112.2 -415.35,-90.55 -401.57,-90.55 -295.28,-90.55 -265.75,-78.74 202.76,-74.8 -283.46,-72.83 -318.9,-70.87 212.6,-68.9 352.36,-68.9 -490.16,-66.93 224.41,-66.93 234.25,-66.93 360.24,-66.93 -425.2,-64.96 -383.86,-64.96 226.38,-59.06 -525.59,-57.09 -435.04,-55.12 234.25,-55.12 350.39,-55.12 -316.93,-53.15 -413.39,-51.18 360.24,-51.18 -377.95,-49.21 374.02,-45.28 -490.16,-43.31 -153.54,-43.31 -517.72,-39.37 -295.28,-37.4 -377.95,-33.46 -507.87,-31.5 375.98,-31.5 -557.09,-29.53 -409.45,-27.56 -492.13,-23.62 -543.31,-17.72 -316.93,-13.78 -515.75,-11.81 -381.89,-9.84 -407.48,0 -549.21,1.97 -511.81,3.94 -431.1,11.81 -411.42,13.78 368.11,25.59 358.27,41.34 -562.99,53.15 352.36,53.15 362.2,53.15 372.05,59.06 362.2,62.99 372.05,72.83 360.24,76.77 285.43,84.65 163.39,88.58 370.08,90.55 360.24,92.52 171.26,94.49 -562.99,96.46 285.43,98.43 372.05,106.3 285.43,108.27 362.2,108.27 364.17,125.98 -561.02,133.86 366.14,143.7 -127.95,153.54 257.87,153.54 375.98,153.54 -561.02,155.51 366.14,155.51 352.36,163.39 -143.7,165.35 -127.95,167.32 269.68,169.29 -316.93,171.26 106.3,175.2 -324.8,177.17 96.46,177.17 -151.57,179.13 116.14,179.13 139.76,179.13 -535.43,181.1 -137.8,183.07 -161.42,185.04 90.55,185.04 108.27,185.04 344.49,187.01 370.08,188.98 -153.54,192.91 -141.73,192.91 -165.35,194.88 -529.53,196.85 -555.12,198.82 350.39,198.82 -555.12,214.57 344.49,214.57 -517.72,222.44 -529.53,238.19 -203.8,240.88 344.49,242.13 -545.28,251.97 -305.12,253.94 -291.34,255.91 346.46,257.87 -305.12,263.78 -289.37,265.75 -279.53,271.65 360.24,271.65 -501.97,277.56 -305.12,277.56 -470.47,281.5 -446.85,281.5 -458.66,283.46 -80.71,285.43 301.18,285.43 88.58,287.4 165.35,287.4 -480.32,289.37 -53.15,289.37 -517.72,291.34 120.08,291.34 133.86,295.28 207.67,295.62 -470.47,297.24 -364.17,297.24 -328.74,297.24 173.23,297.24 253.94,297.24 295.28,297.24 -446.85,299.21 -401.57,299.21 -23.62,299.21 218.5,299.21 350.39,299.21 0,301.18 312.99,301.18
  other v4: -295.28,-297.24 -444.88,-295.28 -409.45,-295.28 -216.54,-295.28 348.43,-269.69 72.83,-251.97 88.58,-251.97 112.2,-250 358.27,-240.16 -224.41,-228.35 -271.65,-226.38 -244.09,-226.38 -145.67,-226.38 -122.05,-226.38 -437.01,-224.41 -377.95,-224.41 -348.43,-224.41 -309.06,-224.41 -405.51,-222.44 -39.37,-214.57 -15.75,-214.57 -452.76,-212.6 360.24,-208.66 -0.61,-207.33 -295.28,-202.76 -265.75,-202.76 -480.32,-200.79 -419.29,-200.79 332.68,-200.79 -232.28,-196.85 -395.67,-194.88 -322.83,-194.88 -358.27,-192.91 -509.84,-188.98 -230.32,-179.13 -287.4,-177.17 364.17,-175.2 -501.97,-173.23 -311.02,-173.23 192.91,-173.23 -387.8,-169.29 342.52,-167.32 -338.58,-165.35 -372.05,-163.39 -222.44,-159.45 204.72,-155.51 -486.22,-149.61 -251.97,-141.73 -277.56,-139.76 192.91,-139.76 350.39,-135.83 -472.44,-133.86 -236.22,-131.89 190.94,-122.05 212.6,-120.08 234.25,-102.36 192.91,-96.46 350.39,-96.46 220.47,-94.49 -322.83,-92.52 -352.36,-88.58 370.08,-84.65 234.25,-80.71 76.77,-78.74 -303.15,-76.77 -403.54,-74.8 -364.17,-72.83 74.8,-62.99 -297.24,-55.12 -116.14,-55.12 -360.24,-47.24 -332.68,-47.24 -395.67,-45.28 -309.06,-31.5 360.24,-29.53 -362.2,-23.62 204.72,-21.65 -397.64,-17.72 374.02,-15.75 17.72,-11.81 -336.61,-5.91 348.43,-5.91 198.82,-3.94 -529.53,1.97 98.43,3.94 118.11,5.91 57.09,9.84 -360.24,11.81 -387.8,13.78 188.98,13.78 -490.16,15.75 232.28,15.75 41.34,21.65 -559.06,25.59 137.8,29.53 354.33,29.53 374.02,37.4 -383.86,39.37 -364.17,49.21 -383.86,61.02 -486.22,64.96 -5.91,70.87 61.02,70.87 350.39,72.83 -551.18,74.8 -425.2,76.77 -393.7,76.77 31.5,80.71 82.68,80.71 259.84,84.65 187.01,86.61 204.72,86.61 222.44,86.61 242.13,86.61 -503.94,88.58 -370.08,90.55 -531.5,92.52 -175.95,92.71 -29.53,96.46 7.87,96.46 271.65,96.46 61.02,98.43 -192.34,99.6 -486.22,102.36 98.43,102.36 251.97,104.33 -549.21,106.3 -389.76,106.3 -429.13,108.27 47.24,108.27 -17.72,112.2 21.65,112.2 198.82,112.2 -370.08,118.11 271.65,118.11 348.43,118.11 -519.69,120.08 76.77,120.08 248.03,124.02 -492.13,125.98 -47.24,125.98 120.08,125.98 39.37,127.95 -78.74,131.89 -23.62,131.89 143.7,137.8 273.62,137.8 96.46,139.76 -234.25,141.73 -102.36,141.73 350.39,145.67 -541.34,147.64 273.62,157.48 -232.28,159.45 -19.69,163.39 116.14,163.39 145.67,163.39 -165.35,165.35 -66.93,165.35 94.49,165.35 -98.43,167.32 165.35,175.2 251.97,175.2 356.3,179.13 273.62,181.1 -553.15,183.07 -175.2,185.04 -124.02,187.01 200.79,188.98 -47.24,192.91 -21.65,196.85 257.87,196.85 277.56,202.76 -407.48,208.66 -222.44,208.66 25.59,210.63 -535.43,214.57 -368.11,214.57 248.03,218.5 271.65,218.5 45.28,222.44 -230.32,224.41 -553.15,236.22 -17.72,248.03 55.12,248.03 -90.55,251.97 0,251.97 -529.53,259.84 -122.05,259.84 -322.83,283.46 -494.09,291.34 -421.26,291.34 -385.83,291.34 -11.81,293.31 11.81,297.24
  other v5: -448.82,-303.15 -425.2,-303.15 -401.57,-301.18 -385.83,-301.18 110.24,-301.18 -11.81,-299.21 31.5,-299.21 -303.15,-297.24 -293.31,-297.24 273.62,-297.24 248.03,-295.28 -37.4,-291.34 -409.45,-289.37 -446.85,-287.4 259.84,-287.4 248.03,-285.43 250,-273.62 224.41,-271.65 31.5,-269.69 -295.28,-261.81 72.83,-259.84 214.57,-259.84 234.25,-251.97 76.77,-250 222.44,-248.03 -277.56,-244.09 250,-238.19 261.81,-236.22 155.51,-234.25 -273.62,-230.31 -259.84,-224.41 259.84,-224.41 246.06,-222.44 -196.85,-202.76 -181.1,-200.79 -232.28,-198.82 -171.26,-194.88 -131.89,-187.01 -226.38,-181.1 -206.69,-175.2 -218.5,-171.26 -291.34,-165.35 -332.68,-161.42 -383.86,-159.45 -372.05,-159.45 -210.63,-157.48 -328.74,-149.61 -208.66,-147.64 -238.19,-141.73 -220.47,-141.73 -194.88,-139.76 -173.23,-139.76 273.62,-139.76 -328.74,-133.86 43.31,-133.86 57.09,-131.89 -263.78,-125.98 96.46,-125.98 271.65,-120.08 -326.77,-118.11 -271.65,-118.11 149.61,-116.14 -261.81,-110.24 -275.59,-106.3 250,-106.3 -13.78,-104.33 269.68,-102.36 240.16,-100.39 281.5,-100.39 -324.8,-98.43 -250,-96.46 -216.54,-80.71 372.05,-80.71 -216.54,-68.9 -161.42,-68.9 -210.63,-57.09 -141.73,-55.12 -131.89,-55.12 -411.42,-51.18 -454.72,-39.37 -440.94,-31.5 -409.45,-25.59 206.69,-21.65 198.82,-5.91 -537.4,-3.94 -521.65,-1.97 -360.24,5.91 -342.52,5.91 238.19,9.84 198.82,11.81 -389.76,13.78 -358.27,15.75 220.47,15.75 -330.71,19.69 -562.99,25.59 -141.73,25.59 -98.43,31.5 -387.8,39.37 -161.42,39.37 -377.95,41.34 -285.43,43.31 -366.14,47.24 -385.83,51.18 -179.13,51.18 -96.46,51.18 -271.65,53.15 -157.48,59.06 -374.02,61.02 -281.5,62.99 -387.8,64.96 -293.31,64.96 -562.99,76.77 -137.8,76.77 230.31,92.52 251.97,94.49 269.68,94.49 283.46,96.46 259.84,104.33 271.65,110.24 163.39,171.26 248.03,173.23 279.53,173.23 41.34,175.2 267.72,179.13 253.94,187.01 204.72,188.98 273.62,192.91 21.65,200.79 -84.65,204.72 -37.4,204.72 279.53,206.69 -401.57,208.66 -374.02,214.57 -72.83,214.57 267.72,214.57 31.5,216.54 47.24,216.54 250,220.47 -401.57,226.38 -62.99,228.35 -51.18,236.22 59.06,250 344.49,275.59 -7.87,287.4 64.96,295.28 346.46,295.28 3.94,297.24
  other v6: 143.7,-301.18 -480.32,-299.21 51.18,-299.21 92.52,-299.21 -364.17,-297.24 -259.84,-297.24 -332.68,-295.28 -557.09,-250 -557.09,-194.88 -559.06,-151.57 -379.92,-90.55 -435.04,-88.58 -503.94,-82.68 377.95,-62.99 -549.21,-49.21 -501.97,-49.21 -425.2,-39.37 -527.56,-23.62 -425.2,-13.78 -559.06,-5.91 -501.97,-5.91 375.98,11.81 377.95,135.83 389.76,289.37 151.57,291.34 190.94,293.31 -39.37,295.28 234.25,297.24
I2C1_SCL: J8.5 R30.1 U1.E8 | length 446.4
  Top w3.94: J8.5@-372.55,210.63 -372.55,195.24 -366.72,189.41 -318.2,189.41 -260.91,132.12 R30.1@-242.15,132.12 -218.91,132.12 v3(-217.98,131.19)
  Inner Layer 3 w2.95: v3(-217.98,131.19) -204.74,117.95 -145.92,117.95 -119.14,91.17 -79.6,91.17 -20.67,32.24 v3(-20.67,20.67)
I2C1_SDA: J8.6 R31.1 U1.E7 | length 535.1
  Top w2.95: R31.1@-203.68,132.12 v3(-203.14,131.53) v3(-203.14,131.53) ; U1.E7@-20.78,6.89 v3(-20.67,6.89)
  Top w3.94: J8.6@-372.55,280.46 -372.55,226.95 -364.04,218.44 -364.04,199.85 -360.49,196.3 -315.35,196.3 -263.38,144.33 -216.3,144.33 -204.09,132.12 R31.1@-203.68,132.12
  Inner Layer 3 w2.95: v3(-203.14,131.53) -195.47,123.86 -142.95,123.86 -116.21,97.12 -77.2,97.12 -11.32,31.24 -11.32,16.24 v3(-20.67,6.89)
I2C2_SCL: R20.1 U1.K5 U7.3 | length 427.2
  Top w2.95: v3(116.46,-162.25) v3(167.65,-213.44)
  Top w3.94: v3(123.83,-15.38) 131.6,-7.61 R20.1@144.1,-7.61
  Inner Layer 2 w2.95: v2(48.23,-20.67) 57.59,-30.03 67.13,-30.03 72.82,-24.34 114.87,-24.34 v3(123.83,-15.38) v3@123.95,-15.26
  Inner Layer 3 w2.95: v3(116.46,-162.25) 120.94,-157.75 120.94,-18.27 v3(123.83,-15.38) ; v3(167.65,-213.44) v4(176.94,-202.43)
  Inner Layer 4 w2.95: v1(128.14,-230.79) 131.51,-234.16 145.21,-234.16 v4(176.94,-202.43)
  Bottom w2.95: U7.3@127.2,-248.35 127.2,-231.73 v1(128.14,-230.79)
I2C2_SDA: R21.1 U1.L5 U7.4 | length 522.1
  Top w2.95: v3(101.66,-162.25) 157.54,-218.13 v3(157.54,-224.63)
  Top w3.94: v3(110.41,-14.98) 110.41,-5.47 145.11,29.23 R21.1@145.11,29.64
  Inner Layer 2 w2.95: v2(62.01,-20.67) 67.7,-14.98 v3(110.41,-14.98)
  Inner Layer 3 w2.95: v3(101.66,-162.25) 115.03,-148.88 115.03,-19.6 v3(110.41,-14.98) ; v3(157.54,-224.63) 172.14,-224.63 189.25,-207.52 189.25,-205.82 195.86,-199.21 v4(195.29,-198.64)
  Inner Layer 4 w2.95: v1(113.42,-231.63) 121.94,-240.15 147.57,-240.15 172.93,-214.79 181.98,-214.79 195.86,-200.91 195.86,-199.21 v4(195.29,-198.64)
  Bottom w2.95: U7.4@113.42,-248.35 v1(113.42,-231.63)
I2C3_SCL: J8.1 R22.1 U1.H2 | length 918.2
  Top w2.95: U1.H2@20.45,-62.01 v2(20.67,-62.01)
  Top w3.94: v3(-502.78,200.39) -500.82,200.39 -497.65,197.22 v3(-427.04,197.22) -427.04,210.63 J8.1@-427.67,210.63
  Inner Layer 2 w2.95: v7(-2.07,-113.49) -6.56,-109 -6.56,-89.24 v2(20.67,-62.01)
  Inner Layer 3 w2.95: v4(-504.5,150.47) -518.83,164.8 -518.83,184.34 v3(-502.78,200.39) ; v3(-427.04,197.22) -406.81,176.99 -356.16,176.99 -307.46,128.29 -307.46,51.3 -278.56,22.4 -268.42,22.4 ; -268.42,22.4 -127.88,-118.13 -26.33,-118.13 -18.99,-110.79 -4.77,-110.79 v7(-2.07,-113.49)
  Inner Layer 4 w2.95: v1(-509.18,214.39) -509.18,207.62 -518.83,197.97 -518.83,164.8 v4(-504.5,150.47)
  Bottom w3.94: R22.1@-530.03,213.84 -509.73,213.84 v1(-509.18,214.39)
I2C3_SDA: J8.2 R23.1 U1.G2 | length 845.3
  Top w2.95: U1.G2@6.71,-62.01 v2(6.89,-62.01)
  Top w3.94: v3(-502.51,184.26) -500.07,186.7 v3(-436.42,186.7) -423.64,186.7 -413.89,196.45 J8.2@-413.89,210.63
  Inner Layer 2 w2.95: v7(-15.13,-120.15) -13.66,-120.15 -13.66,-113.75 -12.47,-112.56 -12.47,-81.37 v2(6.89,-62.01)
  Inner Layer 3 w2.95: v4(-506.53,170.34) v3(-502.51,184.26) ; v3(-436.42,186.7) -420.8,171.08 -358.89,171.08 -313.37,125.56 -313.37,48.85 -281.01,16.49 -270.85,16.49 -130.32,-124.04 -20.29,-124.04 v7(-15.13,-120.15)
  Inner Layer 4 w2.95: v4(-506.53,170.34) -512.87,176.68 -512.87,195.2 v1(-496.68,211.4)
  Bottom w2.95: R23.1@-494.6,210.28 R23.1@-494.6,213.84
  Bottom w3.94: v1(-496.68,211.4) -496.68,213.84 R23.1@-494.6,213.84
I2C5_SCL: J8.3 R24.1 U1.F1 U2.7 | length 719.1
  Top w2.95: v3(-34.96,-105.06) -20.86,-90.96 -20.86,-89.75 U1.F1@-6.89,-75.79
  Top w3.94: v3(-400.66,187.08) -400.66,210.08 J8.3@-400.11,210.63
  Inner Layer 3 w2.95: v3(-400.66,187.08) -389.85,197.89 -360.14,197.89 -292.54,130.29 v4(-287.16,130.29) -279.93,123.06 -279.93,40.47 -273.68,34.22 -263.53,34.22 -130.07,-99.24 -40.78,-99.24 v3(-34.96,-105.06)
  Inner Layer 4 w2.95: v1(-304.23,138.31) -296.21,130.29 v4(-287.16,130.29)
  Bottom w2.95: R24.1@-306.74,140.65 -306.57,140.65 v1(-304.23,138.31)
  Bottom w3.94: U2.7@-353.32,93.52 -353.32,117.72 -344.2,126.84 -309.89,126.84 -306.74,129.99 R24.1@-306.74,140.65
I2C5_SDA: J8.4 R25.1 U1.E1 U2.6 | length 696.7
  Top w2.95: v3(-48.54,-108.77) -48.84,-108.47 -44.31,-103.95 -44.31,-99.43 U1.E1@-20.67,-75.79
  Top w3.94: v3(-386.84,186.67) -386.84,210.12 J8.4@-386.33,210.63
  Inner Layer 3 w2.95: v3(-386.84,186.67) -357.35,186.67 -299.93,129.25 -299.93,117.72 v4(-293.95,110.48) -293.95,46.14 -276.12,28.31 -265.98,28.31 -132.51,-105.15 -84.55,-105.15 -52.16,-105.15 v3(-48.54,-108.77)
  Inner Layer 4 w2.95: v1(-322.21,139.52) -309.12,126.43 -309.12,125.65 v4(-293.95,110.48)
  Bottom w3.94: U2.6@-373.01,93.52 -373.01,112.34 -345.05,140.3 R25.1@-344.64,140.3 -322.99,140.3 v1(-322.21,139.52)
I2C7_SCL: J3.3 R28.1 U1.F3 | length 856.4
  Top w2.95: v2(-6.89,-48.23) U1.F3@-6.57,-48.55
  Top w3.94: v3(-501.99,-224.29) -500.6,-225.68 -482.79,-225.68 -455.26,-253.21 J3.3@-455.26,-281.12
  Inner Layer 2 w2.95: v7(-40.91,-259.94) -35.93,-254.96 -35.93,-254.52 -30.39,-248.98 -30.39,-113.77 -24.69,-108.07 -24.69,-66.03 v2(-6.89,-48.23)
  Inner Layer 3 w2.95: v4(-483.17,-223.79) -482.32,-222.94 -475.71,-229.55 -470.43,-229.55 -455.62,-244.36 -104.38,-244.36 -92.21,-256.53 -44.32,-256.53 v7(-40.91,-259.94)
  Inner Layer 3 w3.94: v3(-501.99,-224.29) -501.99,-224.04 -483.17,-224.04 v4(-483.17,-223.79)
  Inner Layer 4 w2.95: v8(-489.7,-253.23) -490.66,-253.23 -490.66,-231.28 v4(-483.17,-223.79)
  Inner Layer 5 w2.95: v5(-508.19,-268.36) -492.32,-268.36 -489.7,-265.74 v8(-489.7,-253.23)
  Bottom w2.95: R28.1@-508.83,-268.36 v5(-508.19,-268.36)